# Altium PCB ST-LINK-V0.1.PcbDoc (part 3 of 3)
Units mm, origin at the board's own origin, x right, y up, seen from the top; angles counter-clockwise.
Board outline 100 x 100 mm, 2 copper layers (Top Layer, Bottom Layer); 380 components, 33 nets, 1370 pads, 550 vias.
Unrouted connection lines stored in the file: 288.
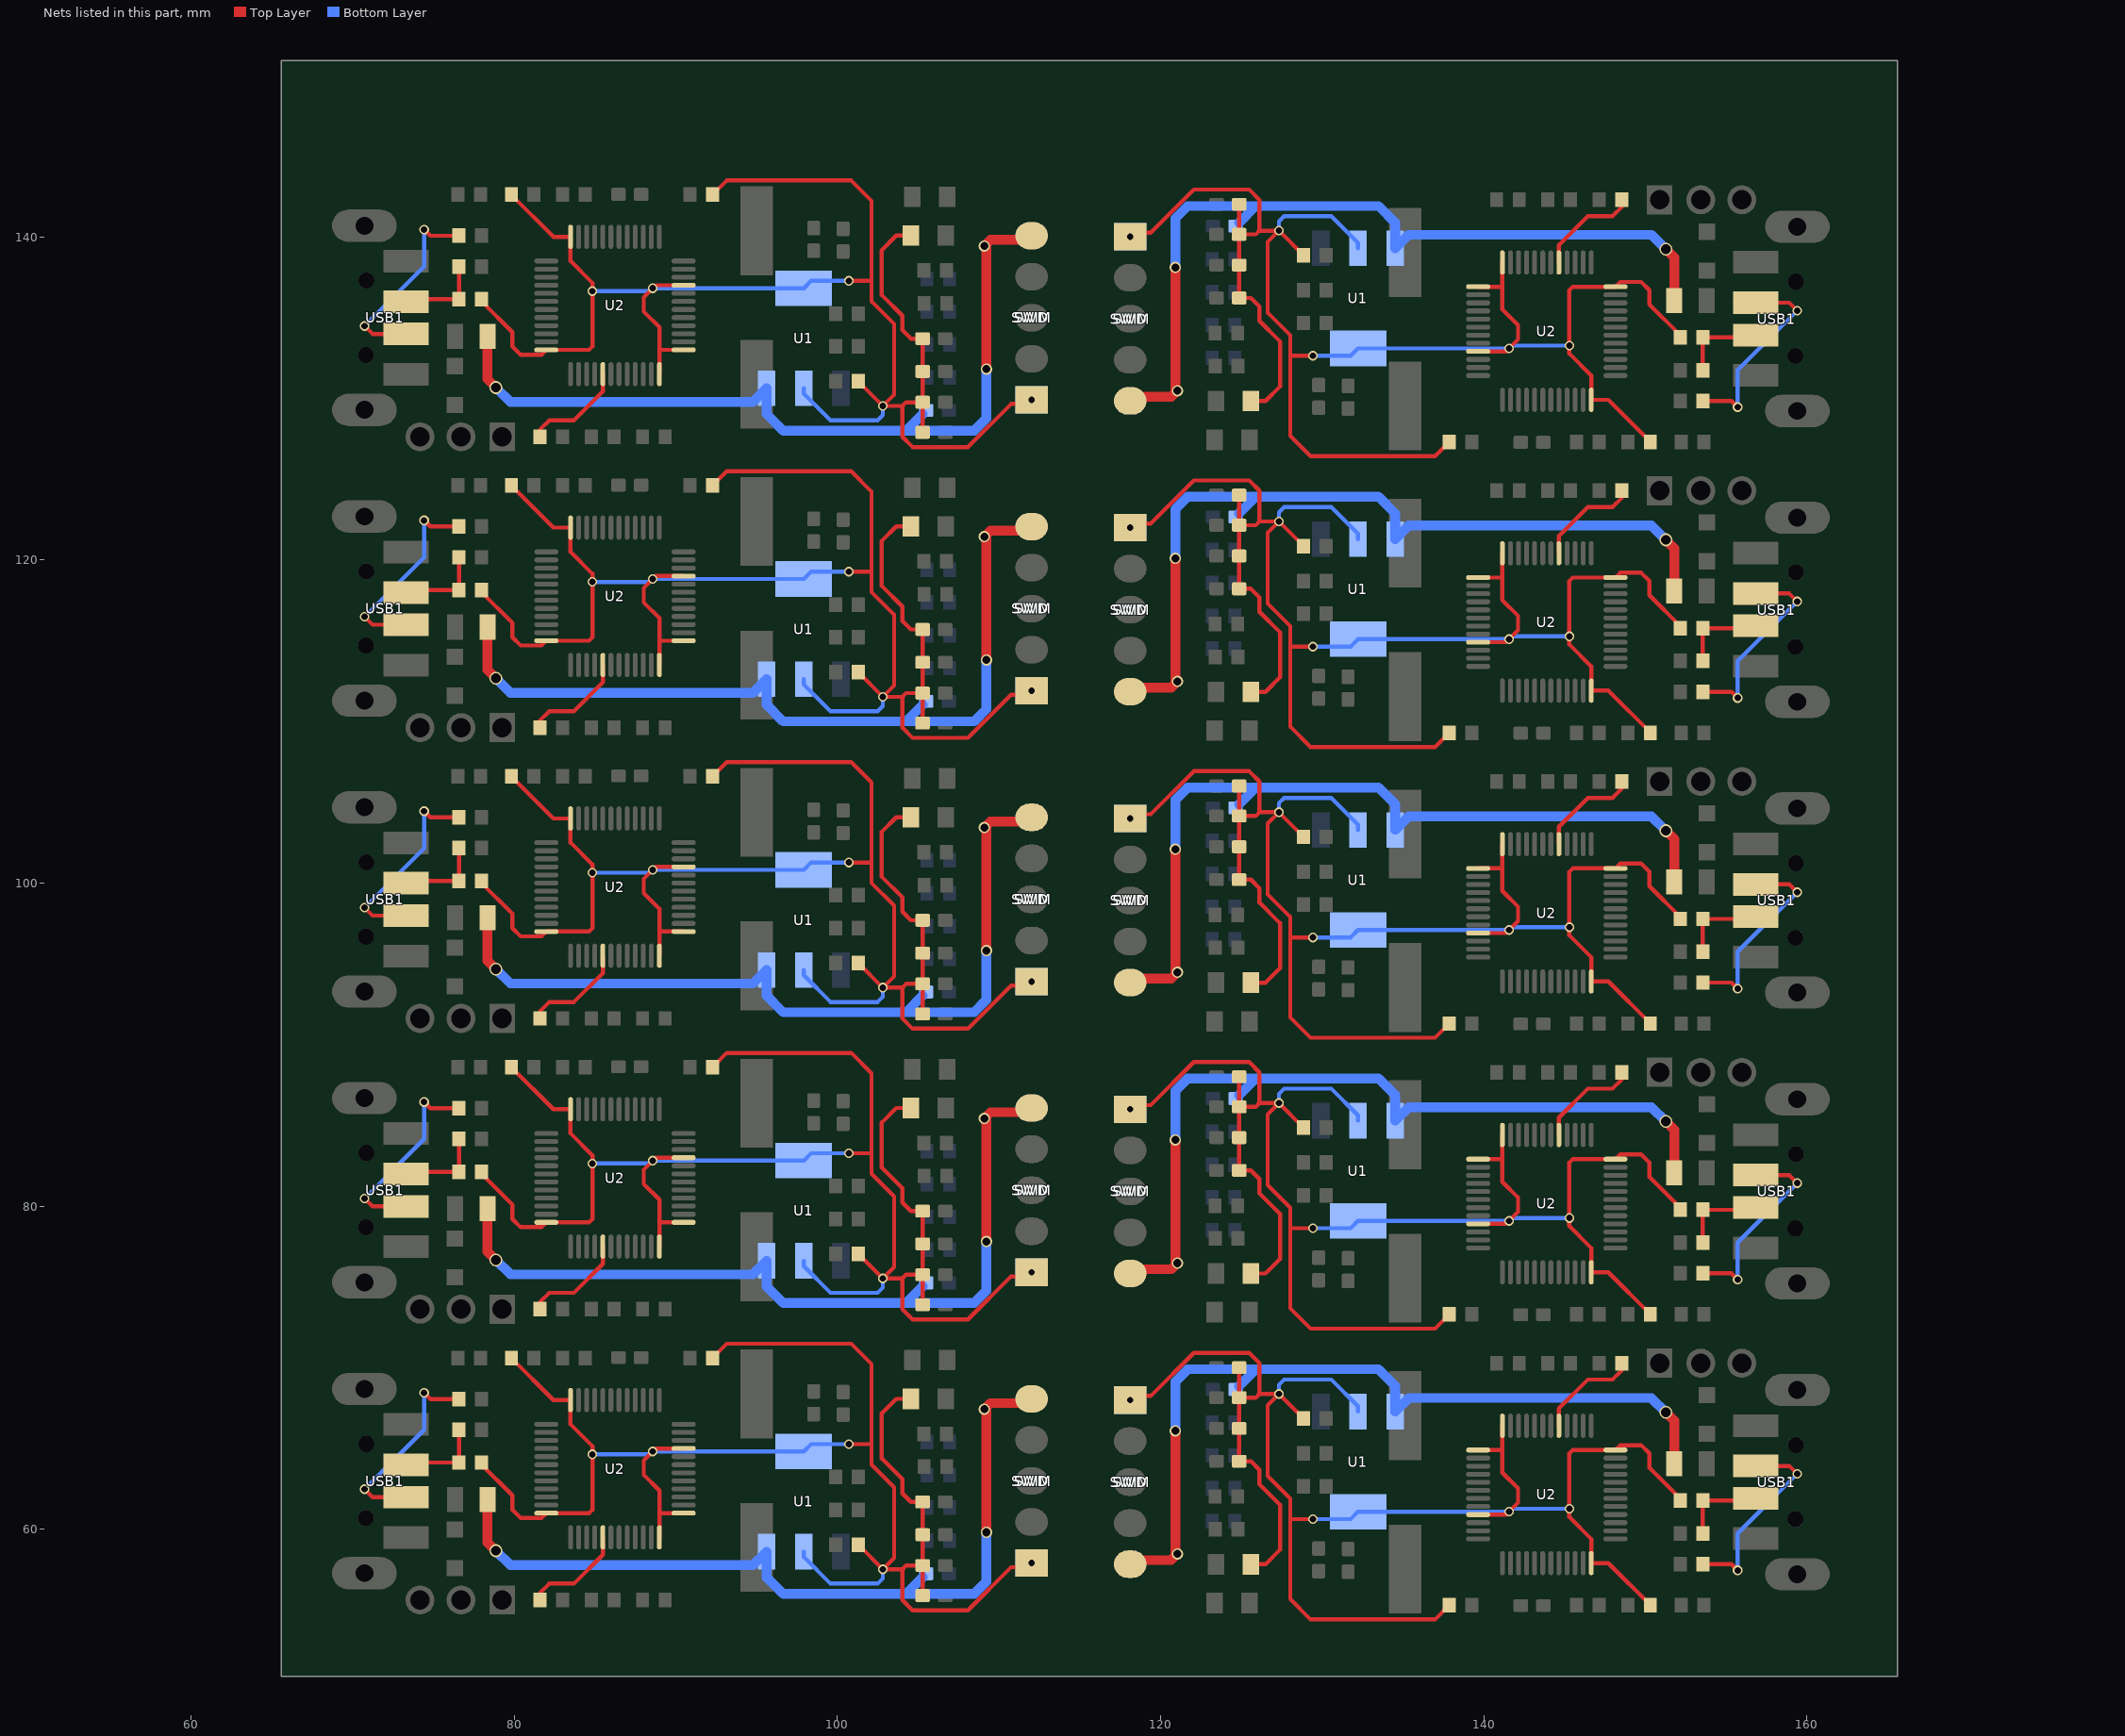
[diagram p3: the nets of this part, all layers, seen from the top]

## Via types
v1: diameter 0.6, hole 0.4, Top Layer to Bottom Layer, 520 vias
v2: diameter 0.7, hole 0.5, Top Layer to Bottom Layer, 20 vias
v3: diameter 0.8, hole 0.6, Top Layer to Bottom Layer, 10 vias

## Nets (pads, with @x,y where several pads share a name; then routed paths per layer and width w, separated by ;. In a path a pad name is that pad's centre, name@x,y a point inside that pad or via, vN(x,y) a via of type N, cw(c..) or ccw(c..) an arc to the next point about the centre after c; other vN are vias at no path point) (continued)
"SWIM RST IN": R14.1 U2.41 | length 63.8
  Top Layer w0.254: R14.1@81.596,55.626 81.596,56.069 82.169,56.642 83.693,56.642 85.483,58.432 U2.41@85.483,59.504 ; R14.1@81.596,73.626 81.596,74.069 82.169,74.642 83.693,74.642 85.483,76.432 U2.41@85.483,77.504 ; R14.1@81.596,91.626 81.596,92.069 82.169,92.642 83.693,92.642 85.483,94.432 U2.41@85.483,95.504 ; R14.1@81.596,109.626 81.596,110.069 82.169,110.642 83.693,110.642 85.483,112.432 U2.41@85.483,113.504 ; R14.1@81.596,127.626 81.596,128.069 82.169,128.642 83.693,128.642 85.483,130.432 U2.41@85.483,131.504 ; U2.41@144.644,66.413 144.644,67.485 146.434,69.275 147.958,69.275 148.531,69.848 R14.1@148.531,70.291 ; U2.41@144.644,84.413 144.644,85.485 146.434,87.275 147.958,87.275 148.531,87.848 R14.1@148.531,88.291 ; U2.41@144.644,102.413 144.644,103.485 146.434,105.275 147.958,105.275 148.531,105.848 R14.1@148.531,106.291 ; U2.41@144.644,120.413 144.644,121.485 146.434,123.275 147.958,123.275 148.531,123.848 R14.1@148.531,124.291 ; U2.41@144.644,138.413 144.644,139.485 146.434,141.275 147.958,141.275 148.531,141.848 R14.1@148.531,142.291
"USB D+": R16.2 R17.1 USB1.3 | length 53.8
  Top Layer w0.254: USB1.3@73.292,63.992 73.435,64.135 R16.2@76.578,64.135 R17.1@76.578,66.167 ; USB1.3@73.292,81.992 73.435,82.135 R16.2@76.578,82.135 R17.1@76.578,84.167 ; USB1.3@73.292,99.992 73.435,100.135 R16.2@76.578,100.135 ; USB1.3@73.292,117.992 73.435,118.135 R16.2@76.578,118.135 R17.1@76.578,120.167 ; USB1.3@73.292,135.992 73.435,136.135 R16.2@76.578,136.135 R17.1@76.578,138.167 ; R16.2@76.578,100.135 R17.1@76.578,102.167 ; R17.1@153.549,59.75 153.549,61.782 156.693,61.782 USB1.3@156.836,61.925 ; R17.1@153.549,77.75 R16.2@153.55,79.782 156.693,79.782 USB1.3@156.836,79.925 ; R17.1@153.549,95.75 R16.2@153.55,97.782 ; R16.2@153.55,97.782 156.693,97.782 USB1.3@156.836,97.925 ; R17.1@153.549,113.75 R16.2@153.55,115.782 156.693,115.782 USB1.3@156.836,115.925 ; R17.1@153.549,131.75 R16.2@153.55,133.782 156.693,133.782 USB1.3@156.836,133.925
"USB D-": R15.1 USB1.2 | length 138.4
  Top Layer w0.254: v1(70.739,62.484) 71.231,61.992 USB1.2@73.292,61.992 USB1.2@74.565,61.992 ; v1(70.739,80.484) 71.231,79.992 USB1.2@73.292,79.992 USB1.2@74.565,79.992 ; v1(70.739,98.484) 71.231,97.992 USB1.2@73.292,97.992 USB1.2@74.565,97.992 ; v1(70.739,116.484) 71.231,115.992 USB1.2@73.292,115.992 USB1.2@74.565,115.992 ; v1(70.739,134.484) 71.231,133.992 USB1.2@73.292,133.992 USB1.2@74.565,133.992 ; v1(74.422,68.453) 74.803,68.072 R15.1@76.578,68.072 ; v1(74.422,86.453) 74.803,86.072 R15.1@76.578,86.072 ; v1(74.422,104.453) 74.803,104.072 R15.1@76.578,104.072 ; v1(74.422,122.453) 74.803,122.072 R15.1@76.578,122.072 ; v1(74.422,140.453) 74.803,140.072 R15.1@76.578,140.072 ; R15.1@153.549,57.845 155.324,57.845 v1(155.705,57.464) ; R15.1@153.549,75.845 155.324,75.845 v1(155.705,75.464) ; R15.1@153.549,93.845 155.324,93.845 v1(155.705,93.464) ; R15.1@153.549,111.845 155.324,111.845 v1(155.705,111.464) ; R15.1@153.549,129.845 155.324,129.845 v1(155.705,129.464) ; USB1.2@155.562,63.925 USB1.2@156.836,63.925 158.896,63.925 v1(159.388,63.433) ; USB1.2@155.562,81.925 USB1.2@156.836,81.925 158.896,81.925 v1(159.388,81.433) ; USB1.2@155.562,99.925 USB1.2@156.836,99.925 158.896,99.925 v1(159.388,99.433) ; USB1.2@155.562,117.925 USB1.2@156.836,117.925 158.896,117.925 v1(159.388,117.433) ; USB1.2@155.562,135.925 USB1.2@156.836,135.925 158.896,135.925 v1(159.388,135.433)
  Bottom Layer w0.254: v1(70.739,62.484) 74.422,66.167 v1(74.422,68.453) ; v1(70.739,80.484) 74.422,84.167 v1(74.422,86.453) ; v1(70.739,98.484) 74.422,102.167 v1(74.422,104.453) ; v1(70.739,116.484) 74.422,120.167 v1(74.422,122.453) ; v1(70.739,134.484) 74.422,138.167 v1(74.422,140.453) ; v1(155.705,57.464) 155.705,59.75 v1(159.388,63.433) ; v1(155.705,75.464) 155.705,77.75 v1(159.388,81.433) ; v1(155.705,93.464) 155.705,95.75 v1(159.388,99.433) ; v1(155.705,111.464) 155.705,113.75 v1(159.388,117.433) ; v1(155.705,129.464) 155.705,131.75 v1(159.388,135.433)
V5.0: C1.2 SWIM.5 U1.3 U3.2 | length 519.1
  Top Layer w0.6: U3.2@78.343,61.849 78.343,59.198 v3(78.867,58.674) ; U3.2@78.343,79.849 78.343,77.198 v3(78.867,76.674) ; U3.2@78.343,97.849 78.343,95.198 v3(78.867,94.674) ; U3.2@78.343,115.849 78.343,113.198 v3(78.867,112.674) ; U3.2@78.343,133.849 78.343,131.198 v3(78.867,130.674) ; v2(109.22,59.817) 109.22,67.31 v2(109.093,67.437) 109.474,67.818 SWIM.5@111.887,67.818 ; v2(109.22,77.817) 109.22,85.31 v2(109.093,85.437) 109.474,85.818 SWIM.5@111.887,85.818 ; v2(109.22,95.817) 109.22,103.31 v2(109.093,103.437) 109.474,103.818 SWIM.5@111.887,103.818 ; v2(109.22,113.817) 109.22,121.31 v2(109.093,121.437) 109.474,121.818 SWIM.5@111.887,121.818 ; v2(109.22,131.817) 109.22,139.31 v2(109.093,139.437) 109.474,139.818 SWIM.5@111.887,139.818 ; SWIM.5@118.24,58.099 120.653,58.099 v2(121.034,58.48) 120.907,58.607 v2(120.907,66.1) ; SWIM.5@118.24,76.099 120.653,76.099 v2(121.034,76.48) 120.907,76.607 v2(120.907,84.1) ; SWIM.5@118.24,94.099 120.653,94.099 v2(121.034,94.48) 120.907,94.607 v2(120.907,102.1) ; SWIM.5@118.24,112.099 120.653,112.099 v2(121.034,112.48) 120.907,112.607 v2(120.907,120.1) ; SWIM.5@118.24,130.099 120.653,130.099 v2(121.034,130.48) 120.907,130.607 v2(120.907,138.1) ; v3(151.26,67.243) 151.784,66.719 U3.2@151.784,64.068 ; v3(151.26,85.243) 151.784,84.719 U3.2@151.784,82.068 ; v3(151.26,103.243) 151.784,102.719 U3.2@151.784,100.068 ; v3(151.26,121.243) 151.784,120.719 U3.2@151.784,118.068 ; v3(151.26,139.243) 151.784,138.719 U3.2@151.784,136.068
  Bottom Layer w0.6: v3(78.867,58.674) 79.756,57.785 94.779,57.785 U1.3@95.617,58.623 95.617,57.037 96.647,56.007 104.246,56.007 ; v3(78.867,76.674) 79.756,75.785 94.779,75.785 U1.3@95.617,76.623 95.617,75.037 96.647,74.007 104.246,74.007 ; v3(78.867,94.674) 79.756,93.785 94.779,93.785 U1.3@95.617,94.623 95.617,93.037 96.647,92.007 104.246,92.007 ; v3(78.867,112.674) 79.756,111.785 94.779,111.785 U1.3@95.617,112.623 95.617,111.037 96.647,110.007 104.246,110.007 ; v3(78.867,130.674) 79.756,129.785 94.779,129.785 U1.3@95.617,130.623 95.617,129.037 96.647,128.007 104.246,128.007 ; C1.2@105.272,57.034 104.246,56.007 ; C1.2@105.272,75.034 104.246,74.007 ; C1.2@105.272,93.034 104.246,92.007 ; C1.2@105.272,111.034 104.246,110.007 ; C1.2@105.272,129.034 104.246,128.007 ; v2(109.22,59.817) 109.22,56.769 108.458,56.007 104.246,56.007 ; v2(109.22,77.817) 109.22,74.769 108.458,74.007 104.246,74.007 ; v2(109.22,95.817) 109.22,92.769 108.458,92.007 104.246,92.007 ; v2(109.22,113.817) 109.22,110.769 108.458,110.007 104.246,110.007 ; v2(109.22,131.817) 109.22,128.769 108.458,128.007 104.246,128.007 ; v2(120.907,66.1) 120.907,69.148 121.669,69.91 125.881,69.91 ; v2(120.907,84.1) 120.907,87.148 121.669,87.91 125.881,87.91 ; v2(120.907,102.1) 120.907,105.148 121.669,105.91 125.881,105.91 ; v2(120.907,120.1) 120.907,123.148 121.669,123.91 125.881,123.91 ; v2(120.907,138.1) 120.907,141.148 121.669,141.91 125.881,141.91 ; C1.2@124.855,68.883 125.881,69.91 ; C1.2@124.855,86.883 125.881,87.91 ; C1.2@124.855,104.883 125.881,105.91 ; C1.2@124.855,122.883 125.881,123.91 ; C1.2@124.855,140.883 125.881,141.91 ; v3(151.26,67.243) 150.371,68.132 135.349,68.132 U1.3@134.51,67.294 134.51,68.88 133.48,69.91 125.881,69.91 ; v3(151.26,85.243) 150.371,86.132 135.349,86.132 U1.3@134.51,85.294 134.51,86.88 133.48,87.91 125.881,87.91 ; v3(151.26,103.243) 150.371,104.132 135.349,104.132 U1.3@134.51,103.294 134.51,104.88 133.48,105.91 125.881,105.91 ; v3(151.26,121.243) 150.371,122.132 135.349,122.132 U1.3@134.51,121.294 134.51,122.88 133.48,123.91 125.881,123.91 ; v3(151.26,139.243) 150.371,140.132 135.349,140.132 U1.3@134.51,139.294 134.51,140.88 133.48,141.91 125.881,141.91
VCC: C5.2 C6.1 C7.1 C8.1 HL1.1 R5.1 R7.2 R16.1 R19.1 SWD.1 SWIM.1 U1.2 U1.4 U2.1 U2.9 U2.24 U2.36 U2.48 | length 1097.9
  Top Layer w0.254: R16.1@77.978,64.135 77.978,64.008 79.883,62.103 79.883,61.214 80.391,60.706 81.685,60.706 U2.36@81.983,61.004 84.626,61.004 84.836,61.214 v1(84.836,64.643) 84.836,65.151 83.483,66.504 U2.24@83.483,68.004 82.426,68.004 R5.1@79.818,70.612 ; R16.1@77.978,82.135 77.978,82.008 79.883,80.103 79.883,79.214 80.391,78.706 81.685,78.706 U2.36@81.983,79.004 84.626,79.004 84.836,79.214 v1(84.836,82.643) 84.836,83.151 83.483,84.504 U2.24@83.483,86.004 82.426,86.004 R5.1@79.818,88.612 ; R16.1@77.978,100.135 77.978,100.008 79.883,98.103 79.883,97.214 80.391,96.706 81.685,96.706 U2.36@81.983,97.004 84.626,97.004 84.836,97.214 v1(84.836,100.643) 84.836,101.151 83.483,102.504 U2.24@83.483,104.004 82.426,104.004 R5.1@79.818,106.612 ; R16.1@77.978,118.135 77.978,118.008 79.883,116.103 79.883,115.214 80.391,114.706 81.685,114.706 U2.36@81.983,115.004 84.626,115.004 84.836,115.214 v1(84.836,118.643) 84.836,119.151 83.483,120.504 U2.24@83.483,122.004 82.426,122.004 R5.1@79.818,124.612 ; R16.1@77.978,136.135 77.978,136.008 79.883,134.103 79.883,133.214 80.391,132.706 81.685,132.706 U2.36@81.983,133.004 84.626,133.004 84.836,133.214 v1(84.836,136.643) 84.836,137.151 83.483,138.504 U2.24@83.483,140.004 82.426,140.004 R5.1@79.818,142.612 ; U2.48@88.983,59.504 88.983,62.401 88.011,63.373 88.011,64.262 v1(88.57,64.821) 88.753,65.004 U2.9@90.483,65.004 ; U2.48@88.983,77.504 88.983,80.401 88.011,81.373 88.011,82.262 v1(88.57,82.821) 88.753,83.004 U2.9@90.483,83.004 ; U2.48@88.983,95.504 88.983,98.401 88.011,99.373 88.011,100.262 v1(88.57,100.821) 88.753,101.004 U2.9@90.483,101.004 ; U2.48@88.983,113.504 88.983,116.401 88.011,117.373 88.011,118.262 v1(88.57,118.821) 88.753,119.004 U2.9@90.483,119.004 ; U2.48@88.983,131.504 88.983,134.401 88.011,135.373 88.011,136.262 v1(88.57,136.821) 88.753,137.004 U2.9@90.483,137.004 ; 89.027,61.004 U2.1@90.483,61.004 ; 89.027,79.004 U2.1@90.483,79.004 ; 89.027,97.004 U2.1@90.483,97.004 ; 89.027,115.004 U2.1@90.483,115.004 ; 89.027,133.004 U2.1@90.483,133.004 ; R19.1@92.267,70.612 93.146,71.491 100.848,71.491 102.108,70.231 102.108,64.008 103.505,62.611 103.505,58.228 v1(102.808,57.531) ; R19.1@92.267,88.612 93.146,89.491 100.848,89.491 102.108,88.231 102.108,82.008 103.505,80.611 103.505,76.228 v1(102.808,75.531) ; R19.1@92.267,106.612 93.146,107.491 100.848,107.491 102.108,106.231 102.108,100.008 103.505,98.611 103.505,94.228 v1(102.808,93.531) ; R19.1@92.267,124.612 93.146,125.491 100.848,125.491 102.108,124.231 102.108,118.008 103.505,116.611 103.505,112.228 v1(102.808,111.531) ; R19.1@92.267,142.612 93.146,143.491 100.848,143.491 102.108,142.231 102.108,136.008 103.505,134.611 103.505,130.228 v1(102.808,129.531) ; v1(100.711,65.278) 102.108,65.278 ; v1(100.711,83.278) 102.108,83.278 ; v1(100.711,101.278) 102.108,101.278 ; v1(100.711,119.278) 102.108,119.278 ; v1(100.711,137.278) 102.108,137.278 ; R7.2@101.284,59.055 v1(102.808,57.531) ; R7.2@101.284,77.055 v1(102.808,75.531) ; R7.2@101.284,95.055 v1(102.808,93.531) ; R7.2@101.284,113.055 v1(102.808,111.531) ; R7.2@101.284,131.055 v1(102.808,129.531) ; HL1.1@104.54,68.079 103.639,68.079 102.743,67.183 102.743,64.389 104.013,63.119 104.013,62.23 104.543,61.7 C8.1@105.27,61.7 C7.1@105.27,59.668 C6.1@105.27,57.763 ; HL1.1@104.54,86.079 103.639,86.079 102.743,85.183 102.743,82.389 104.013,81.119 104.013,80.23 104.543,79.7 C8.1@105.27,79.7 C7.1@105.27,77.668 C6.1@105.27,75.763 ; HL1.1@104.54,104.079 103.639,104.079 102.743,103.183 102.743,100.389 104.013,99.119 104.013,98.23 104.543,97.7 C8.1@105.27,97.7 C7.1@105.27,95.668 C6.1@105.27,93.763 ; HL1.1@104.54,122.079 103.639,122.079 102.743,121.183 102.743,118.389 104.013,117.119 104.013,116.23 104.543,115.7 C8.1@105.27,115.7 C7.1@105.27,113.668 C6.1@105.27,111.763 ; HL1.1@104.54,140.079 103.639,140.079 102.743,139.183 102.743,136.389 104.013,135.119 104.013,134.23 104.543,133.7 C8.1@105.27,133.7 C7.1@105.27,131.668 C6.1@105.27,129.763 ; C5.2@105.27,55.902 C6.1@105.27,57.763 ; C5.2@105.27,73.902 C6.1@105.27,75.763 ; C5.2@105.27,91.902 C6.1@105.27,93.763 ; C5.2@105.27,109.902 C6.1@105.27,111.763 ; C5.2@105.27,127.902 C6.1@105.27,129.763 ; SWIM.1@111.887,57.658 110.744,57.658 108.077,54.991 104.648,54.991 104.013,55.626 104.013,57.531 ; SWIM.1@111.887,75.658 110.744,75.658 108.077,72.991 104.648,72.991 104.013,73.626 104.013,75.531 ; SWIM.1@111.887,93.658 110.744,93.658 108.077,90.991 104.648,90.991 104.013,91.626 104.013,93.531 ; SWIM.1@111.887,111.658 110.744,111.658 108.077,108.991 104.648,108.991 104.013,109.626 104.013,111.531 ; SWIM.1@111.887,129.658 110.744,129.658 108.077,126.991 104.648,126.991 104.013,127.626 104.013,129.531 ; SWIM.1@118.24,68.259 119.383,68.259 122.05,70.926 125.479,70.926 126.114,70.291 126.114,68.386 ; SWIM.1@118.24,86.259 119.383,86.259 122.05,88.926 125.479,88.926 126.114,88.291 126.114,86.386 ; SWIM.1@118.24,104.259 119.383,104.259 122.05,106.926 125.479,106.926 126.114,106.291 126.114,104.386 ; SWIM.1@118.24,122.259 119.383,122.259 122.05,124.926 125.479,124.926 126.114,124.291 126.114,122.386 ; SWIM.1@118.24,140.259 119.383,140.259 122.05,142.926 125.479,142.926 126.114,142.291 126.114,140.386 ; C5.2@124.858,70.015 C6.1@124.858,68.154 ; C5.2@124.858,88.015 C6.1@124.858,86.154 ; C5.2@124.858,106.015 C6.1@124.858,104.154 ; C5.2@124.858,124.015 C6.1@124.858,122.154 ; C5.2@124.858,142.015 C6.1@124.858,140.154 ; HL1.1@125.587,57.838 126.488,57.838 127.384,58.734 127.384,61.528 126.114,62.798 126.114,63.687 125.584,64.217 C8.1@124.858,64.217 C7.1@124.858,66.249 C6.1@124.858,68.154 ; HL1.1@125.587,75.838 126.488,75.838 127.384,76.734 127.384,79.528 126.114,80.798 126.114,81.687 125.584,82.217 C8.1@124.858,82.217 C7.1@124.858,84.249 C6.1@124.858,86.154 ; HL1.1@125.587,93.838 126.488,93.838 127.384,94.734 127.384,97.528 126.114,98.798 126.114,99.687 125.584,100.217 C8.1@124.858,100.217 C7.1@124.858,102.249 C6.1@124.858,104.154 ; HL1.1@125.587,111.838 126.488,111.838 127.384,112.734 127.384,115.528 126.114,116.798 126.114,117.687 125.584,118.217 C8.1@124.858,118.217 C7.1@124.858,120.249 C6.1@124.858,122.154 ; HL1.1@125.587,129.838 126.488,129.838 127.384,130.734 127.384,133.528 126.114,134.798 126.114,135.687 125.584,136.217 C8.1@124.858,136.217 C7.1@124.858,138.249 C6.1@124.858,140.154 ; 128.019,60.639 v1(129.416,60.639) ; 128.019,78.639 v1(129.416,78.639) ; 128.019,96.639 v1(129.416,96.639) ; 128.019,114.639 v1(129.416,114.639) ; 128.019,132.639 v1(129.416,132.639) ; R7.2@128.843,66.862 v1(127.319,68.386) ; R7.2@128.843,84.862 v1(127.319,86.386) ; R7.2@128.843,102.862 v1(127.319,104.386) ; R7.2@128.843,120.862 v1(127.319,122.386) ; R7.2@128.843,138.862 v1(127.319,140.386) ; R19.1@137.861,55.305 136.982,54.426 129.279,54.426 128.019,55.686 128.019,61.909 126.622,63.306 126.622,67.689 v1(127.319,68.386) ; R19.1@137.861,73.305 136.982,72.426 129.279,72.426 128.019,73.686 128.019,79.909 126.622,81.306 126.622,85.689 v1(127.319,86.386) ; R19.1@137.861,91.305 136.982,90.426 129.279,90.426 128.019,91.686 128.019,97.909 126.622,99.306 126.622,103.689 v1(127.319,104.386) ; R19.1@137.861,109.305 136.982,108.426 129.279,108.426 128.019,109.686 128.019,115.909 126.622,117.306 126.622,121.689 v1(127.319,122.386) ; R19.1@137.861,127.305 136.982,126.426 129.279,126.426 128.019,127.686 128.019,133.909 126.622,135.306 126.622,139.689 v1(127.319,140.386) ; U2.9@139.644,60.913 141.374,60.913 v1(141.558,61.096) 142.116,61.655 142.116,62.544 141.144,63.516 U2.48@141.144,66.413 ; U2.1@139.644,64.913 141.1,64.913 ; U2.9@139.644,78.913 141.374,78.913 v1(141.558,79.096) 142.116,79.655 142.116,80.544 141.144,81.516 U2.48@141.144,84.413 ; U2.1@139.644,82.913 141.1,82.913 ; U2.9@139.644,96.913 141.374,96.913 v1(141.558,97.096) 142.116,97.655 142.116,98.544 141.144,99.516 U2.48@141.144,102.413 ; U2.1@139.644,100.913 141.1,100.913 ; U2.9@139.644,114.913 141.374,114.913 v1(141.558,115.096) 142.116,115.655 142.116,116.544 141.144,117.516 U2.48@141.144,120.413 ; U2.1@139.644,118.913 141.1,118.913 ; U2.9@139.644,132.913 141.374,132.913 v1(141.558,133.096) 142.116,133.655 142.116,134.544 141.144,135.516 U2.48@141.144,138.413 ; U2.1@139.644,136.913 141.1,136.913 ; R5.1@150.309,55.305 147.701,57.913 U2.24@146.644,57.913 146.644,59.413 145.291,60.766 v1(145.291,61.274) 145.291,64.703 145.501,64.913 U2.36@148.144,64.913 148.442,65.211 149.736,65.211 150.244,64.703 150.244,63.814 152.15,61.909 R16.1@152.15,61.782 ; R5.1@150.309,73.305 147.701,75.913 U2.24@146.644,75.913 146.644,77.413 145.291,78.766 v1(145.291,79.274) 145.291,82.703 145.501,82.913 U2.36@148.144,82.913 148.442,83.211 149.736,83.211 150.244,82.703 150.244,81.814 152.15,79.909 R16.1@152.15,79.782 ; R5.1@150.309,91.305 147.701,93.913 U2.24@146.644,93.913 146.644,95.413 145.291,96.766 v1(145.291,97.274) 145.291,100.703 145.501,100.913 U2.36@148.144,100.913 148.442,101.211 149.736,101.211 150.244,100.703 150.244,99.814 152.15,97.909 R16.1@152.15,97.782 ; R5.1@150.309,109.305 147.701,111.913 U2.24@146.644,111.913 146.644,113.413 145.291,114.766 v1(145.291,115.274) 145.291,118.703 145.501,118.913 U2.36@148.144,118.913 148.442,119.211 149.736,119.211 150.244,118.703 150.244,117.814 152.15,115.909 R16.1@152.15,115.782 ; R5.1@150.309,127.305 147.701,129.913 U2.24@146.644,129.913 146.644,131.413 145.291,132.766 v1(145.291,133.274) 145.291,136.703 145.501,136.913 U2.36@148.144,136.913 148.442,137.211 149.736,137.211 150.244,136.703 150.244,135.814 152.15,133.909 R16.1@152.15,133.782 ; v1(102.808,57.531) 104.013,57.531 ; v1(102.808,75.531) 104.013,75.531 ; v1(102.808,93.531) 104.013,93.531 ; v1(102.808,111.531) 104.013,111.531 ; v1(102.808,129.531) 104.013,129.531 ; 104.013,57.531 104.245,57.763 C6.1@105.27,57.763 ; 104.013,75.531 104.245,75.763 C6.1@105.27,75.763 ; 104.013,93.531 104.245,93.763 C6.1@105.27,93.763 ; 104.013,111.531 104.245,111.763 C6.1@105.27,111.763 ; 104.013,129.531 104.245,129.763 C6.1@105.27,129.763 ; C6.1@124.858,68.154 125.882,68.154 126.114,68.386 ; C6.1@124.858,86.154 125.882,86.154 126.114,86.386 ; C6.1@124.858,104.154 125.882,104.154 126.114,104.386 ; C6.1@124.858,122.154 125.882,122.154 126.114,122.386 ; C6.1@124.858,140.154 125.882,140.154 126.114,140.386 ; 126.114,68.386 v1(127.319,68.386) ; 126.114,86.386 v1(127.319,86.386) ; 126.114,104.386 v1(127.319,104.386) ; 126.114,122.386 v1(127.319,122.386) ; 126.114,140.386 v1(127.319,140.386)
  Bottom Layer w0.254: v1(84.836,64.643) 88.392,64.643 v1(88.57,64.821) U1.4@97.917,64.821 98.374,65.278 v1(100.711,65.278) ; v1(84.836,82.643) 88.392,82.643 v1(88.57,82.821) U1.4@97.917,82.821 98.374,83.278 v1(100.711,83.278) ; v1(84.836,100.643) 88.392,100.643 v1(88.57,100.821) U1.4@97.917,100.821 98.374,101.278 v1(100.711,101.278) ; v1(84.836,118.643) 88.392,118.643 v1(88.57,118.821) U1.4@97.917,118.821 98.374,119.278 v1(100.711,119.278) ; v1(84.836,136.643) 88.392,136.643 v1(88.57,136.821) U1.4@97.917,136.821 98.374,137.278 v1(100.711,137.278) ; U1.2@97.917,58.623 97.917,58.293 99.568,56.642 102.489,56.642 102.808,56.961 v1(102.808,57.531) ; U1.2@97.917,76.623 97.917,76.293 99.568,74.642 102.489,74.642 102.808,74.961 v1(102.808,75.531) ; U1.2@97.917,94.623 97.917,94.293 99.568,92.642 102.489,92.642 102.808,92.961 v1(102.808,93.531) ; U1.2@97.917,112.623 97.917,112.293 99.568,110.642 102.489,110.642 102.808,110.961 v1(102.808,111.531) ; U1.2@97.917,130.623 97.917,130.293 99.568,128.642 102.489,128.642 102.808,128.961 v1(102.808,129.531) ; v1(127.319,68.386) 127.319,68.956 127.638,69.275 130.559,69.275 132.21,67.624 U1.2@132.21,67.294 ; v1(127.319,86.386) 127.319,86.956 127.638,87.275 130.559,87.275 132.21,85.624 U1.2@132.21,85.294 ; v1(127.319,104.386) 127.319,104.956 127.638,105.275 130.559,105.275 132.21,103.624 U1.2@132.21,103.294 ; v1(127.319,122.386) 127.319,122.956 127.638,123.275 130.559,123.275 132.21,121.624 U1.2@132.21,121.294 ; v1(127.319,140.386) 127.319,140.956 127.638,141.275 130.559,141.275 132.21,139.624 U1.2@132.21,139.294 ; v1(129.416,60.639) 131.753,60.639 U1.4@132.21,61.096 v1(141.558,61.096) 141.735,61.274 v1(145.291,61.274) ; v1(129.416,78.639) 131.753,78.639 U1.4@132.21,79.096 v1(141.558,79.096) 141.735,79.274 v1(145.291,79.274) ; v1(129.416,96.639) 131.753,96.639 U1.4@132.21,97.096 v1(141.558,97.096) 141.735,97.274 v1(145.291,97.274) ; v1(129.416,114.639) 131.753,114.639 U1.4@132.21,115.096 v1(141.558,115.096) 141.735,115.274 v1(145.291,115.274) ; v1(129.416,132.639) 131.753,132.639 U1.4@132.21,133.096 v1(141.558,133.096) 141.735,133.274 v1(145.291,133.274)
  other v1: 112.014,57.912 118.113,68.005 112.014,75.912 118.113,86.005 112.014,93.912 118.113,104.005 112.014,111.912 118.113,122.005 112.014,129.912 118.113,140.005
pads on no net: U2.2 U2.3 U2.4 U2.11 U2.12 U2.13 U2.14 U2.16 U2.17 U2.19 U2.28 U2.29 U2.31 U2.38 U2.39 U2.40 USB1. USB1.5 USB1.6

## Polygon pours and split planes (outlines as drawn)
GND on Top Layer "Bottom Layer-No Net" (solid, remove dead copper, pour order 30): 67.437,144.39 115.824,144.39 115.824,125.467 115.697,125.34 115.57,125.213 67.056,125.213
GND on Top Layer "Bottom Layer-No Net" (solid, remove dead copper, pour order 30): 162.69,125.527 114.303,125.527 114.303,144.45 114.43,144.577 114.557,144.704 163.071,144.704
GND on Top Layer "Bottom Layer-No Net" (solid, remove dead copper, pour order 30): 67.437,126.39 115.824,126.39 115.824,107.467 115.697,107.34 115.57,107.213 67.056,107.213
GND on Top Layer "Bottom Layer-No Net" (solid, remove dead copper, pour order 30): 162.69,107.527 114.303,107.527 114.303,126.45 114.43,126.577 114.557,126.704 163.071,126.704
GND on Top Layer "Bottom Layer-No Net" (solid, remove dead copper, pour order 30): 67.437,108.39 115.824,108.39 115.824,89.467 115.697,89.34 115.57,89.213 67.056,89.213
GND on Top Layer "Bottom Layer-No Net" (solid, remove dead copper, pour order 30): 162.69,89.527 114.303,89.527 114.303,108.45 114.43,108.577 114.557,108.704 163.071,108.704
GND on Top Layer "Bottom Layer-No Net" (solid, remove dead copper, pour order 30): 67.437,90.39 115.824,90.39 115.824,71.467 115.697,71.34 115.57,71.213 67.056,71.213
GND on Top Layer "Bottom Layer-No Net" (solid, remove dead copper, pour order 30): 162.69,71.527 114.303,71.527 114.303,90.45 114.43,90.577 114.557,90.704 163.071,90.704
GND on Top Layer "Bottom Layer-No Net" (solid, remove dead copper, pour order 30): 162.69,53.527 114.303,53.527 114.303,72.45 114.43,72.577 114.557,72.704 163.071,72.704
GND on Top Layer "Bottom Layer-No Net" (solid, remove dead copper, pour order 30): 67.437,72.39 115.824,72.39 115.824,53.467 115.697,53.34 115.57,53.213 67.056,53.213
GND on Bottom Layer "Bottom Layer-No Net" (solid, remove dead copper, pour order 40): 67.31,144.39 115.443,144.39 115.57,144.263 115.57,125.467 67.437,125.467 67.31,125.594 67.056,125.848 67.056,144.263
GND on Bottom Layer "Bottom Layer-No Net" (solid, remove dead copper, pour order 40): 162.817,125.527 114.684,125.527 114.557,125.654 114.557,144.45 162.69,144.45 162.817,144.323 163.071,144.069 163.071,125.654
GND on Bottom Layer "Bottom Layer-No Net" (solid, remove dead copper, pour order 40): 67.31,126.39 115.443,126.39 115.57,126.263 115.57,107.467 67.437,107.467 67.31,107.594 67.056,107.848 67.056,126.263
GND on Bottom Layer "Bottom Layer-No Net" (solid, remove dead copper, pour order 40): 162.817,107.527 114.684,107.527 114.557,107.654 114.557,126.45 162.69,126.45 162.817,126.323 163.071,126.069 163.071,107.654
GND on Bottom Layer "Bottom Layer-No Net" (solid, remove dead copper, pour order 40): 67.31,108.39 115.443,108.39 115.57,108.263 115.57,89.467 67.437,89.467 67.31,89.594 67.056,89.848 67.056,108.263
GND on Bottom Layer "Bottom Layer-No Net" (solid, remove dead copper, pour order 40): 162.817,89.527 114.684,89.527 114.557,89.654 114.557,108.45 162.69,108.45 162.817,108.323 163.071,108.069 163.071,89.654
GND on Bottom Layer "Bottom Layer-No Net" (solid, remove dead copper, pour order 40): 67.31,90.39 115.443,90.39 115.57,90.263 115.57,71.467 67.437,71.467 67.31,71.594 67.056,71.848 67.056,90.263
GND on Bottom Layer "Bottom Layer-No Net" (solid, remove dead copper, pour order 40): 162.817,71.527 114.684,71.527 114.557,71.654 114.557,90.45 162.69,90.45 162.817,90.323 163.071,90.069 163.071,71.654
GND on Bottom Layer "Bottom Layer-No Net" (solid, remove dead copper, pour order 40): 162.817,53.527 114.684,53.527 114.557,53.654 114.557,72.45 162.69,72.45 162.817,72.323 163.071,72.069 163.071,53.654
GND on Bottom Layer "Bottom Layer-No Net" (solid, remove dead copper, pour order 40): 67.31,72.39 115.443,72.39 115.57,72.263 115.57,53.467 67.437,53.467 67.31,53.594 67.056,53.848 67.056,72.263

## Keep-outs
Keep-Out Layer:
  lines w0.1: 70.565,71.958 cw(c70.565,74.958) 67.565,74.958 67.565,86.958 cw(c70.565,86.958) 70.565,89.958 ; 70.565,71.958 ccw(c70.565,68.958) 67.565,68.958 67.565,56.958 ccw(c70.565,56.958) 70.565,53.958 114.064,53.958 ccw(c114.064,54.958) 115.064,54.958 ; 70.565,71.958 114.064,71.958 ; 70.565,71.958 114.064,71.958 ; 70.565,89.958 cw(c70.565,92.958) 67.565,92.958 67.565,104.958 cw(c70.565,104.958) 70.565,107.958 ; 70.565,89.958 114.064,89.958 ; 70.565,89.958 114.064,89.958 ; 70.565,107.958 cw(c70.565,110.958) 67.565,110.958 67.565,122.958 cw(c70.565,122.958) 70.565,125.958 ; 70.565,107.958 114.064,107.958 ; 70.565,107.958 114.064,107.958 ; 70.565,125.958 cw(c70.565,128.958) 67.565,128.958 67.565,140.958 cw(c70.565,140.958) 70.565,143.958 114.064,143.958 cw(c114.064,142.958) 115.064,142.958 ; 70.565,125.958 114.064,125.958 ; 70.565,125.958 114.064,125.958 ; 114.064,71.958 ccw(c114.064,72.958) 115.064,72.958 ; 114.064,71.958 cw(c114.064,70.958) 115.064,70.958 ; 114.064,89.958 ccw(c114.064,90.958) 115.064,90.958 ; 114.064,89.958 cw(c114.064,88.958) 115.064,88.958 ; 114.064,107.958 ccw(c114.064,108.958) 115.064,108.958 ; 114.064,107.958 cw(c114.064,106.958) 115.064,106.958 ; 114.064,125.958 ccw(c114.064,126.958) 115.064,126.958 ; 114.064,125.958 cw(c114.064,124.958) 115.064,124.958 ; 115.064,54.958 ccw(c116.064,54.958) 116.064,53.958 159.562,53.958 ccw(c159.562,56.958) 162.562,56.958 162.562,68.958 ccw(c159.562,68.958) 159.562,71.958 ; 115.064,54.958 115.064,70.958 ; 115.064,54.958 115.064,70.958 ; 115.064,70.958 cw(c116.064,70.958) 116.064,71.958 ; 115.064,72.958 ccw(c116.064,72.958) 116.064,71.958 ; 115.064,72.958 115.064,88.958 ; 115.064,72.958 115.064,88.958 ; 115.064,88.958 cw(c116.064,88.958) 116.064,89.958 ; 115.064,90.958 ccw(c116.064,90.958) 116.064,89.958 ; 115.064,90.958 115.064,106.958 ; 115.064,90.958 115.064,106.958 ; 115.064,106.958 cw(c116.064,106.958) 116.064,107.958 ; 115.064,108.958 ccw(c116.064,108.958) 116.064,107.958 ; 115.064,108.958 115.064,124.958 ; 115.064,108.958 115.064,124.958 ; 115.064,124.958 cw(c116.064,124.958) 116.064,125.958 ; 115.064,126.958 ccw(c116.064,126.958) 116.064,125.958 ; 115.064,126.958 115.064,142.958 ; 115.064,126.958 115.064,142.958 ; 115.064,142.958 cw(c116.064,142.958) 116.064,143.958 159.562,143.958 cw(c159.562,140.958) 162.562,140.958 162.562,128.958 cw(c159.562,128.958) 159.562,125.958 ; 116.064,71.958 159.562,71.958 ; 116.064,71.958 159.562,71.958 ; 116.064,89.958 159.562,89.958 ; 116.064,89.958 159.562,89.958 ; 116.064,107.958 159.562,107.958 ; 116.064,107.958 159.562,107.958 ; 116.064,125.958 159.562,125.958 ; 116.064,125.958 159.562,125.958 ; 159.562,71.958 ccw(c159.562,74.958) 162.562,74.958 162.562,86.958 ccw(c159.562,86.958) 159.562,89.958 ; 159.562,89.958 ccw(c159.562,92.958) 162.562,92.958 162.562,104.958 ccw(c159.562,104.958) 159.562,107.958 ; 159.562,107.958 ccw(c159.562,110.958) 162.562,110.958 162.562,122.958 ccw(c159.562,122.958) 159.562,125.958

## Silkscreen, mask and mechanical layers (free items; w line width, h text height)
Top Overlay:
  text "3.3V" at 120.272,141.529 h0.6 r270
  text "5V" at 109.855,139.437 h0.6 r90
  text "SWIM" at 120.299,138.735 h0.6 r270
  text "RST" at 109.828,136.516 h0.6 r90
  text "GND" at 120.299,135.941 h0.6 r270
  text "GND" at 109.828,133.976 h0.6 r90
  text "RST" at 120.299,133.401 h0.6 r270
  text "SWIM" at 109.828,131.182 h0.6 r90
  text "5V" at 120.272,130.48 h0.6 r270
  text "3.3V" at 109.855,128.388 h0.6 r90
  text "3.3V" at 120.272,123.529 h0.6 r270
  text "5V" at 109.855,121.437 h0.6 r90
  text "SWIM" at 120.299,120.735 h0.6 r270
  text "RST" at 109.828,118.516 h0.6 r90
  text "GND" at 120.299,117.941 h0.6 r270
  text "GND" at 109.828,115.976 h0.6 r90
  text "RST" at 120.299,115.401 h0.6 r270
  text "SWIM" at 109.828,113.182 h0.6 r90
  text "5V" at 120.272,112.48 h0.6 r270
  text "3.3V" at 109.855,110.388 h0.6 r90
  text "3.3V" at 120.272,105.529 h0.6 r270
  text "5V" at 109.855,103.437 h0.6 r90
  text "SWIM" at 120.299,102.735 h0.6 r270
  text "RST" at 109.828,100.516 h0.6 r90
  text "GND" at 120.299,99.941 h0.6 r270
  text "GND" at 109.828,97.976 h0.6 r90
  text "RST" at 120.299,97.401 h0.6 r270
  text "SWIM" at 109.828,95.182 h0.6 r90
  text "5V" at 120.272,94.48 h0.6 r270
  text "3.3V" at 109.855,92.388 h0.6 r90
  text "3.3V" at 120.272,87.529 h0.6 r270
  text "5V" at 109.855,85.437 h0.6 r90
  text "SWIM" at 120.299,84.735 h0.6 r270
  text "RST" at 109.828,82.516 h0.6 r90
  text "GND" at 120.299,81.941 h0.6 r270
  text "GND" at 109.828,79.976 h0.6 r90
  text "RST" at 120.299,79.401 h0.6 r270
  text "SWIM" at 109.828,77.182 h0.6 r90
  text "5V" at 120.272,76.48 h0.6 r270
  text "3.3V" at 109.855,74.388 h0.6 r90
  text "3.3V" at 120.272,69.529 h0.6 r270
  text "5V" at 109.855,67.437 h0.6 r90
  text "SWIM" at 120.299,66.735 h0.6 r270
  text "RST" at 109.828,64.516 h0.6 r90
  text "GND" at 120.299,63.941 h0.6 r270
  text "GND" at 109.828,61.976 h0.6 r90
  text "RST" at 120.299,61.401 h0.6 r270
  text "SWIM" at 109.828,59.182 h0.6 r90
  text "5V" at 120.272,58.48 h0.6 r270
  text "3.3V" at 109.855,56.388 h0.6 r90
Bottom Overlay:
  text "GND" at 109.855,141.088 h0.6 r90
  text "3.3V" at 120.272,139.751 h0.6 r270
  text "RST" at 109.855,138.802 h0.6 r90
  text "SWCLK" at 109.855,136.643 h0.6 r90
  text "SWDIO" at 120.272,136.449 h0.6 r270
  text "SWDIO" at 109.855,133.468 h0.6 r90
  text "SWCLK" at 120.272,133.274 h0.6 r270
  text "RST" at 120.272,131.115 h0.6 r270
  text "3.3V" at 109.855,130.166 h0.6 r90
  text "GND" at 120.272,128.829 h0.6 r270
  text "GND" at 109.855,123.088 h0.6 r90
  text "3.3V" at 120.272,121.751 h0.6 r270
  text "RST" at 109.855,120.802 h0.6 r90
  text "SWCLK" at 109.855,118.643 h0.6 r90
  text "SWDIO" at 120.272,118.449 h0.6 r270
  text "SWDIO" at 109.855,115.468 h0.6 r90
  text "SWCLK" at 120.272,115.274 h0.6 r270
  text "RST" at 120.272,113.115 h0.6 r270
  text "3.3V" at 109.855,112.166 h0.6 r90
  text "GND" at 120.272,110.829 h0.6 r270
  text "GND" at 109.855,105.088 h0.6 r90
  text "3.3V" at 120.272,103.751 h0.6 r270
  text "RST" at 109.855,102.802 h0.6 r90
  text "SWCLK" at 109.855,100.643 h0.6 r90
  text "SWDIO" at 120.272,100.449 h0.6 r270
  text "SWDIO" at 109.855,97.468 h0.6 r90
  text "SWCLK" at 120.272,97.274 h0.6 r270
  text "RST" at 120.272,95.115 h0.6 r270
  text "3.3V" at 109.855,94.166 h0.6 r90
  text "GND" at 120.272,92.829 h0.6 r270
  text "GND" at 109.855,87.088 h0.6 r90
  text "3.3V" at 120.272,85.751 h0.6 r270
  text "RST" at 109.855,84.802 h0.6 r90
  text "SWCLK" at 109.855,82.643 h0.6 r90
  text "SWDIO" at 120.272,82.449 h0.6 r270
  text "SWDIO" at 109.855,79.468 h0.6 r90
  text "SWCLK" at 120.272,79.274 h0.6 r270
  text "RST" at 120.272,77.115 h0.6 r270
  text "3.3V" at 109.855,76.166 h0.6 r90
  text "GND" at 120.272,74.829 h0.6 r270
  text "GND" at 109.855,69.088 h0.6 r90
  text "3.3V" at 120.272,67.751 h0.6 r270
  text "RST" at 109.855,66.802 h0.6 r90
  text "SWCLK" at 109.855,64.643 h0.6 r90
  text "SWDIO" at 120.272,64.449 h0.6 r270
  text "SWDIO" at 109.855,61.468 h0.6 r90
  text "SWCLK" at 120.272,61.274 h0.6 r270
  text "RST" at 120.272,59.115 h0.6 r270
  text "3.3V" at 109.855,58.166 h0.6 r90
  text "GND" at 120.272,56.829 h0.6 r270
Mechanical 1:
  lines w0.1: 70.565,71.958 cw(c70.565,74.958) 67.565,74.958 67.565,86.958 cw(c70.565,86.958) 70.565,89.958 ; 70.565,71.958 ccw(c70.565,68.958) 67.565,68.958 67.565,56.958 ccw(c70.565,56.958) 70.565,53.958 114.064,53.958 ccw(c114.064,54.958) 115.064,54.958 ; 70.565,71.958 114.064,71.958 ; 70.565,71.958 114.064,71.958 ; 70.565,89.958 cw(c70.565,92.958) 67.565,92.958 67.565,104.958 cw(c70.565,104.958) 70.565,107.958 ; 70.565,89.958 114.064,89.958 ; 70.565,89.958 114.064,89.958 ; 70.565,107.958 cw(c70.565,110.958) 67.565,110.958 67.565,122.958 cw(c70.565,122.958) 70.565,125.958 ; 70.565,107.958 114.064,107.958 ; 70.565,107.958 114.064,107.958 ; 70.565,125.958 cw(c70.565,128.958) 67.565,128.958 67.565,140.958 cw(c70.565,140.958) 70.565,143.958 114.064,143.958 cw(c114.064,142.958) 115.064,142.958 ; 70.565,125.958 114.064,125.958 ; 70.565,125.958 114.064,125.958 ; 114.064,71.958 ccw(c114.064,72.958) 115.064,72.958 ; 114.064,71.958 cw(c114.064,70.958) 115.064,70.958 ; 114.064,89.958 ccw(c114.064,90.958) 115.064,90.958 ; 114.064,89.958 cw(c114.064,88.958) 115.064,88.958 ; 114.064,107.958 ccw(c114.064,108.958) 115.064,108.958 ; 114.064,107.958 cw(c114.064,106.958) 115.064,106.958 ; 114.064,125.958 ccw(c114.064,126.958) 115.064,126.958 ; 114.064,125.958 cw(c114.064,124.958) 115.064,124.958 ; 115.064,54.958 ccw(c116.064,54.958) 116.064,53.958 159.562,53.958 ccw(c159.562,56.958) 162.562,56.958 162.562,68.958 ccw(c159.562,68.958) 159.562,71.958 ; 115.064,54.958 115.064,70.958 ; 115.064,54.958 115.064,70.958 ; 115.064,70.958 cw(c116.064,70.958) 116.064,71.958 ; 115.064,72.958 ccw(c116.064,72.958) 116.064,71.958 ; 115.064,72.958 115.064,88.958 ; 115.064,72.958 115.064,88.958 ; 115.064,88.958 cw(c116.064,88.958) 116.064,89.958 ; 115.064,90.958 ccw(c116.064,90.958) 116.064,89.958 ; 115.064,90.958 115.064,106.958 ; 115.064,90.958 115.064,106.958 ; 115.064,106.958 cw(c116.064,106.958) 116.064,107.958 ; 115.064,108.958 ccw(c116.064,108.958) 116.064,107.958 ; 115.064,108.958 115.064,124.958 ; 115.064,108.958 115.064,124.958 ; 115.064,124.958 cw(c116.064,124.958) 116.064,125.958 ; 115.064,126.958 ccw(c116.064,126.958) 116.064,125.958 ; 115.064,126.958 115.064,142.958 ; 115.064,126.958 115.064,142.958 ; 115.064,142.958 cw(c116.064,142.958) 116.064,143.958 159.562,143.958 cw(c159.562,140.958) 162.562,140.958 162.562,128.958 cw(c159.562,128.958) 159.562,125.958 ; 116.064,71.958 159.562,71.958 ; 116.064,71.958 159.562,71.958 ; 116.064,89.958 159.562,89.958 ; 116.064,89.958 159.562,89.958 ; 116.064,107.958 159.562,107.958 ; 116.064,107.958 159.562,107.958 ; 116.064,125.958 159.562,125.958 ; 116.064,125.958 159.562,125.958 ; 159.562,71.958 ccw(c159.562,74.958) 162.562,74.958 162.562,86.958 ccw(c159.562,86.958) 159.562,89.958 ; 159.562,89.958 ccw(c159.562,92.958) 162.562,92.958 162.562,104.958 ccw(c159.562,104.958) 159.562,107.958 ; 159.562,107.958 ccw(c159.562,110.958) 162.562,110.958 162.562,122.958 ccw(c159.562,122.958) 159.562,125.958 ; 65.582,50.896 165.582,50.896 165.582,150.897 65.582,150.897 65.582,50.896